# Altium PCB STM32_Main-PCB_2025-01-24.pcbdoc
Units mm, origin at the board's own origin, x right, y up, seen from the top; angles counter-clockwise.
Board outline 78.99 x 48.51 mm, 2 copper layers (Top Layer, Bottom Layer); 38 components, 54 nets, 179 pads, 32 vias.
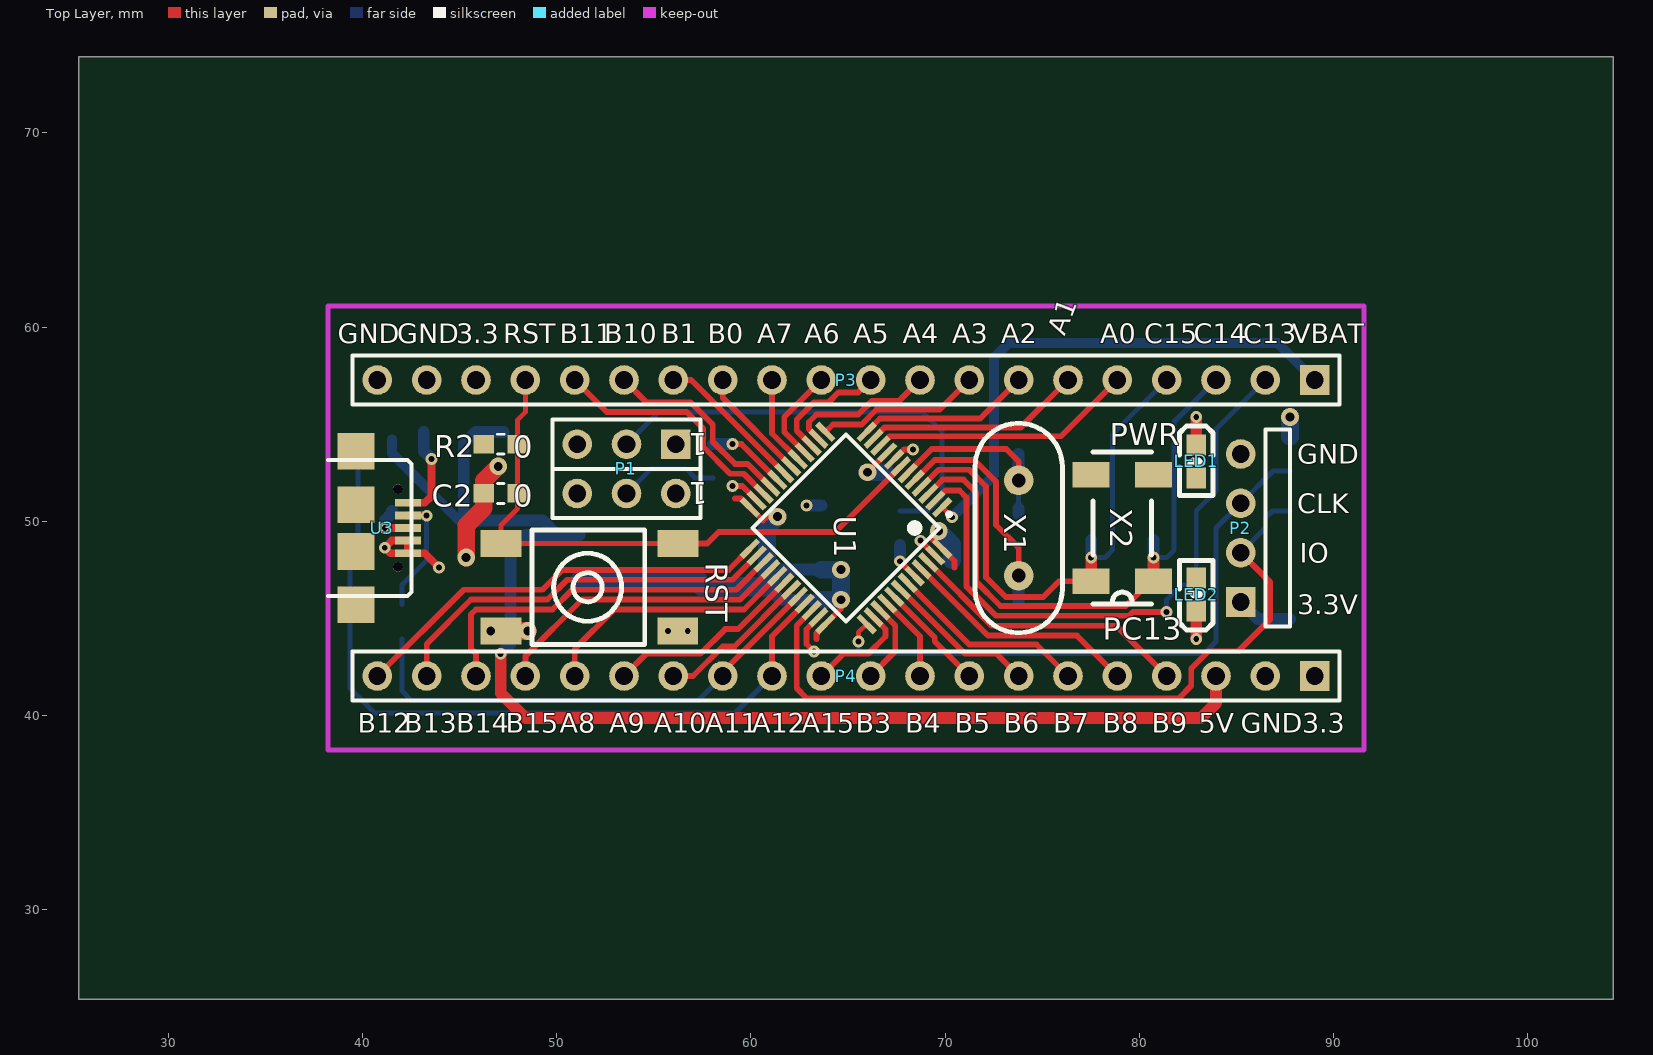
[diagram p0: Top Layer view]
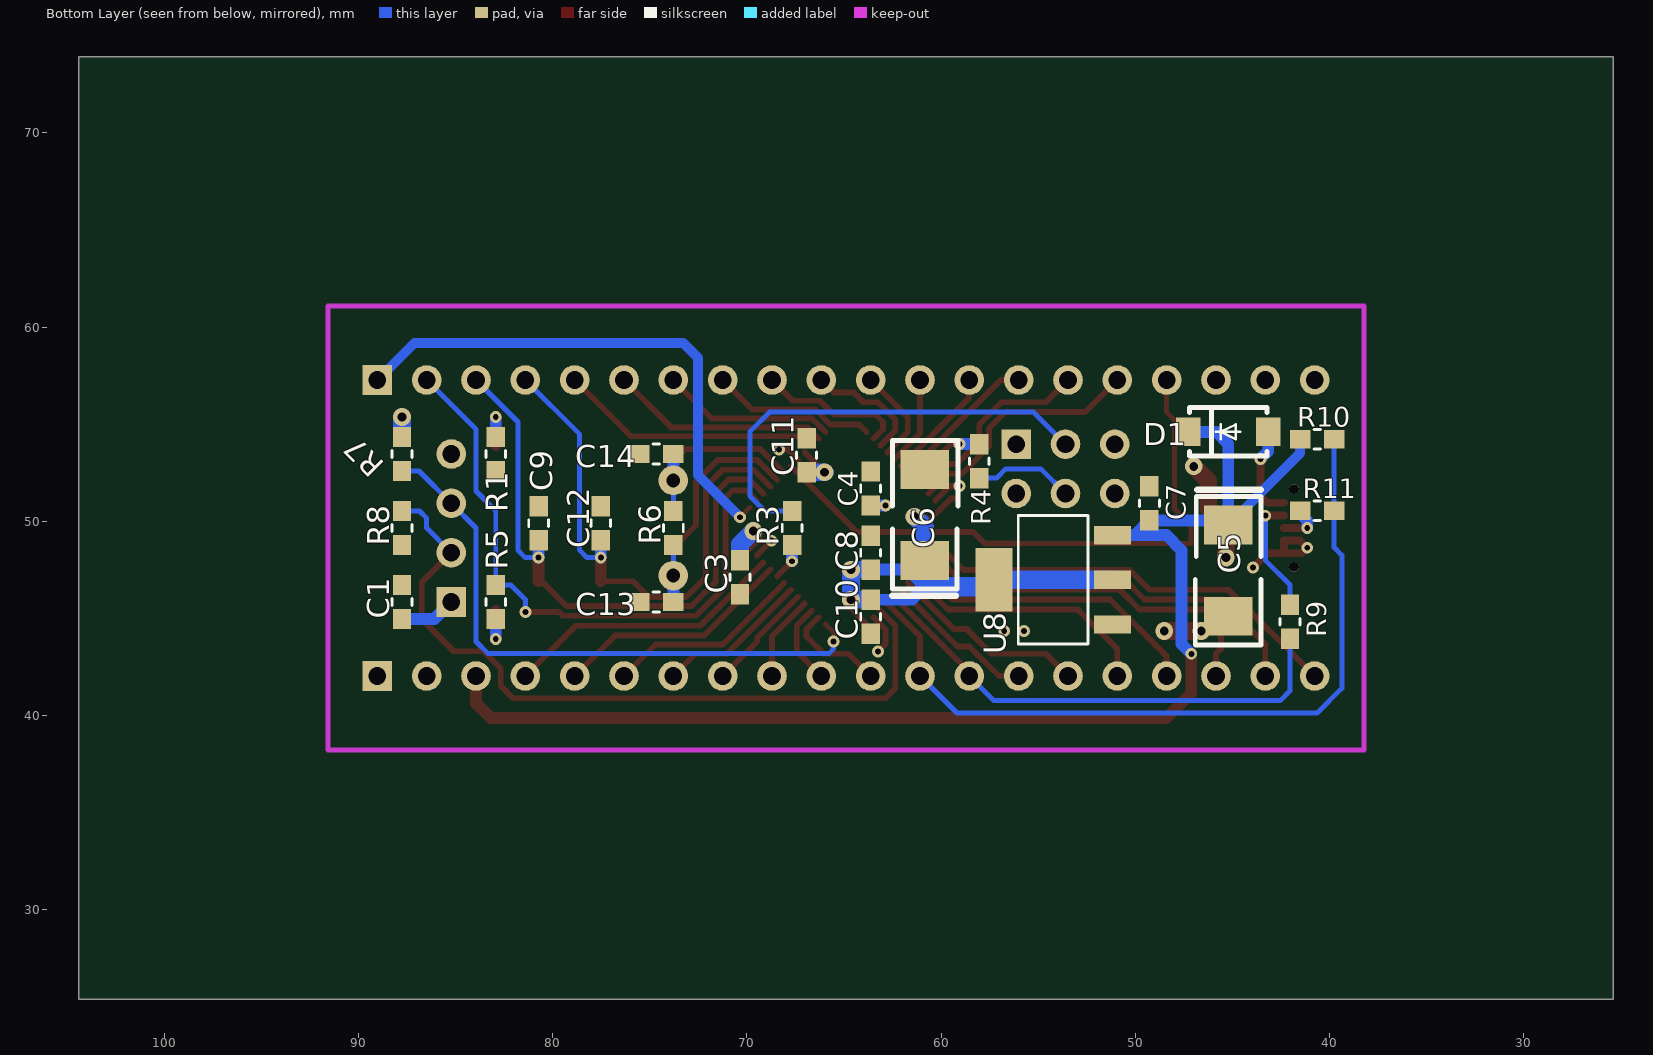
[diagram p1: Bottom Layer view, seen from below]

## Layer stack, top to bottom
Top Layer: signal copper (thickness not stored)
Dielectric: dielectric 0.32, FR-4, Dk 4.8
Bottom Layer: signal copper (thickness not stored)

## Board outline
104.394,25.4 25.4,25.4 25.4,73.914 104.394,73.914

## Components (designator, comment, footprint, x,y, rotation, side; value= is the part's Value field where it differs from the comment)
C1 "100nF" 0603_1608METRIC_PAD1.05X0.95MM_HANDSOLDER#1 87.757,45.847 r90 bottom
C2 "1uF" 0603_1608METRIC_PAD1.05X0.95MM_HANDSOLDER#2 47.117,51.435 r0 top
C3 "100nF" 0603_1608METRIC_PAD1.05X0.95MM_HANDSOLDER#1 70.355,47.117 r270 bottom
C4 "100nF" 0603_1608METRIC_PAD1.05X0.95MM_HANDSOLDER#1 63.627,51.689 r90 bottom
C5 "100uF" CASE-C_6032 45.212,47.46 r270 bottom
C6 "330uF" CASE-C_6032 60.833,50.328 r90 bottom
C7 "100nF" 0603_1608METRIC_PAD1.05X0.95MM_HANDSOLDER#1 49.276,50.927 r90 bottom
C8 "100nF" 0603_1608METRIC_PAD1.05X0.95MM_HANDSOLDER#1 63.627,48.387 r90 bottom
C9 "20pF" 0603_1608METRIC_PAD1.05X0.95MM_HANDSOLDER#1 80.721,49.911 r90 bottom
C10 "100nF" 0603_1608METRIC_PAD1.05X0.95MM_HANDSOLDER#1 63.627,45.085 r270 bottom
C11 "100nF" 0603_1608METRIC_PAD1.05X0.95MM_HANDSOLDER#1 66.929,53.405 r90 bottom
C12 "20pF" 0603_1608METRIC_PAD1.05X0.95MM_HANDSOLDER#1 77.521,49.911 r90 bottom
C13 "20pF" 0603_1608METRIC_PAD1.05X0.95MM_HANDSOLDER#1 74.662,45.847 r0 bottom
C14 "20pF" 0603_1608METRIC_PAD1.05X0.95MM_HANDSOLDER#1 74.662,53.467 r0 bottom
D1 "SS110-A" SMA(DO-214AC) 45.212,54.607 r180 bottom
LED1 "XL-0603QYGC" LED-0603 82.931,53.086 r270 top
LED2 "XL-0603QYGC" LED-0603 82.931,46.228 r90 top
P1 "HDR-IDC-2.54-2X3P" 3X2-2.54-HEADER 53.594,52.705 r270 top
P2 "SWD" HEADER-2.54-P4 85.217,49.657 r90 top
P3 "210S-1*20P L=11.6MMGold-plated black" HEADER-2.54-P20 64.897,57.277 r180 top
P4 "210S-1*20P L=11.6MMGold-plated black" HEADER-2.54-P20 64.897,42.037 r180 top
R1 "510" 0603_1608METRIC_PAD1.05X0.95MM_HANDSOLDER#1 82.931,53.467 r90 bottom
R2 "10K" 0603_1608METRIC_PAD1.05X0.95MM_HANDSOLDER#2 47.117,53.975 r180 top
R3 "100K" 0603_1608METRIC_PAD1.05X0.95MM_HANDSOLDER#1 67.67,49.657 r270 bottom
R4 "100K" 0603_1608METRIC_PAD1.05X0.95MM_HANDSOLDER#1 58.039,53.1 r90 bottom
R5 "510" 0603_1608METRIC_PAD1.05X0.95MM_HANDSOLDER#1 82.931,45.847 r270 bottom
R6 "1M" 0603_1608METRIC_PAD1.05X0.95MM_HANDSOLDER#1 73.787,49.657 r90 bottom
R7 "10K" 0603_1608METRIC_PAD1.05X0.95MM_HANDSOLDER#1 87.757,53.467 r90 bottom
R8 "10K" 0603_1608METRIC_PAD1.05X0.95MM_HANDSOLDER#1 87.757,49.657 r270 bottom
R9 "20" 0603_1608METRIC_PAD1.05X0.95MM_HANDSOLDER#1 42.037,44.831 r90 bottom
R10 "1.5K" 0603_1608METRIC_PAD1.05X0.95MM_HANDSOLDER#1 40.64,54.229 r180 bottom
R11 "20" 0603_1608METRIC_PAD1.05X0.95MM_HANDSOLDER#1 40.64,50.546 r0 bottom
RST "K2-6639SP-C4SC-04" KEY-6.0*6.0 51.689,46.609 r0 top
U1 "STM32F103C8T6" ST-LQFP48 64.897,49.657 r135 top
U3 "Micro USB-B 5P_C40942" USB-MICROB 38.227,49.657 r270 top
U8 "AMS1117-3.3" SOT-223 54.229,46.99 r270 bottom
X1 "8MHz" OSC-49S-1 73.787,49.657 r180 top
X2 "32.768KHz" MC-306 79.121,49.657 r90 top

## Footprints (in the part's own frame and the unit in brackets; to place one, negate y for a bottom-side part, rotate by r counter-clockwise, add the part's x,y. Pads: shape width x height; smd on the part's side, far side on the other; paste and mask are expansions set on the pad)
3X2-2.54-HEADER [mil]
  rect 60x60 hole 36 paste+0 mask+4: 1(-50,100)
  round 60 hole 36 paste+0 mask+4: 2(50,100) 3(-50,0) 4(50,0) 5(-50,-100) 6(50,-100)
  silkscreen extent -100,-150 100,150
0603_1608METRIC_PAD1.05X0.95MM_HANDSOLDER#1 [mm]
  rect 1.05x0.95 smd paste+0 mask+0.102: 1(0.875,0) 2(-0.875,0)
  silkscreen extent -0.17,-0.51 0.17,0.51
0603_1608METRIC_PAD1.05X0.95MM_HANDSOLDER#2 [mm]
  rect 1.05x0.95 smd paste+0 mask+0.102: 1(-0.875,0) 2(0.875,0)
  silkscreen extent -0.17,-0.51 0.17,0.51
CASE-C_6032 [mm]
  rect 2x2.5 smd paste+0 mask+0.102: 1(-2.35,0) 2(2.35,0)
  silkscreen extent -4.17,-1.7 3.84,1.68
HEADER-2.54-P4 [mil]
  rect 60x60 hole 36 paste+0 mask+4: 1(-150,0)
  round 60 hole 36 paste+0 mask+4: 2(-50,0) 3(50,0) 4(150,0)
  silkscreen extent -200,-100 200,-50
HEADER-2.54-P20 [mil]
  rect 60x60 hole 36 paste+0 mask+4: 1(-950,0)
  round 60 hole 36 paste+0 mask+4: 2(-850,0) 3(-750,0) 4(-650,0) 5(-550,0) 6(-450,0) 7(-350,0) 8(-250,0) 9(-150,0) 10(-50,0) 11(50,0) 12(150,0) 13(250,0) 14(350,0) 15(450,0) 16(550,0) 17(650,0) 18(750,0) 19(850,0) 20(950,0)
  silkscreen extent -1000,-50 1000,50
KEY-6.0*6.0 [mm]
  rect 2.1x1.4 smd paste+0 mask+0.102: 1(4.55,-2.252) 2(-4.553,-2.252) 3(4.553,2.252) 4(-4.553,2.249)
  silkscreen extent -2.95,-2.95 2.85,2.95
LED-0603 [mil]
  rect 43x39 smd paste+0 mask+4: 1(33.5,0) 2(-33.5,0)
  silkscreen extent -72,-34 70,34
MC-306 [mil]
  rect 51.2x74.8 smd paste+0 mask+4: 1(-108,-63) 2(108,-63) 3(108,63) 4(-108,63)
  silkscreen extent -154,-59 154,59
OSC-49S-1 [mil]
  round 60 hole 28 paste+0 mask+4: 1(0,96.46) 2(0,-96.46)
  silkscreen extent -89,-212 89,212
SMA(DO-214AC) [mil]
  rect 50x57.9 smd paste+0 mask+4: 1(81,0) 2(-81,0)
  silkscreen extent -79,-49 78,49
SOT-223 [mm]
  rect 0.95x1.9 smd paste+0 mask+0.102: 1(2.301,3.051) 2(0,3.051) 3(-2.3,3.051)
  rect 3.25x1.9 smd paste+0 mask+0.102: 4(0,-3.051)
  silkscreen extent -3.3,-1.8 3.3,1.8
ST-LQFP48 [mm]
  rect 0.3x1.2 smd paste+0 mask+0.05: 1(-2.751,-4.25) 2(-2.25,-4.25) 3(-1.75,-4.25) 4(-1.25,-4.249) 5(-0.75,-4.25) 6(-0.251,-4.25) 7(0.251,-4.25) 8(0.75,-4.25) 9(1.25,-4.249) 10(1.75,-4.25) 11(2.25,-4.25) 12(2.751,-4.25) 25(2.751,4.25) 26(2.25,4.25) 27(1.75,4.25) 28(1.25,4.249) 29(0.75,4.25) 30(0.251,4.25) 31(-0.251,4.25) 32(-0.75,4.25) 33(-1.25,4.249) 34(-1.75,4.25) 35(-2.25,4.25) 36(-2.75,4.249)
  rect 1.2x0.3 smd paste+0 mask+0.05: 13(4.25,-2.751) 14(4.25,-2.25) 15(4.25,-1.75) 16(4.249,-1.25) 17(4.25,-0.75) 18(4.25,-0.251) 19(4.25,0.251) 20(4.25,0.75) 21(4.249,1.25) 22(4.25,1.75) 23(4.25,2.25) 24(4.249,2.75) 37(-4.25,2.751) 38(-4.25,2.25) 39(-4.25,1.75) 40(-4.249,1.25) 41(-4.25,0.75) 42(-4.25,0.251) 43(-4.25,-0.251) 44(-4.25,-0.75) 45(-4.249,-1.25) 46(-4.25,-1.75) 47(-4.25,-2.25) 48(-4.249,-2.75)
  silkscreen extent -3.4,-4.35 3.4,3.4
USB-MICROB [mm]
  rect 1.9x1.9 smd paste+0 mask+0.102: 0(-3.95,1.45) 0(-1.199,1.45) 0(1.2,1.45) 0(3.95,1.45)
  rect 0.4x1.35 smd paste+0 mask+0.051: 1(-1.3,4.125) 2(-0.65,4.125) 3(0,4.125) 4(0.65,4.125) 5(1.3,4.125)
  round 0.5 hole 0.5 unplated paste+0: ""(-2,3.6) ""(2,3.6)
  silkscreen extent -3.5,0 3.5,4.3

## Via types
v1: diameter 0.61, hole 0.305, Top Layer to Bottom Layer, tented both sides, 22 vias
v2: diameter 0.914, hole 0.457, Top Layer to Bottom Layer, tented both sides, 10 vias

## Nets (pads, with @x,y where several pads share a name; then routed paths per layer and width w, separated by ;. In a path a pad name is that pad's centre, name@x,y a point inside that pad or via, vN(x,y) a via of type N, cw(c..) or ccw(c..) an arc to the next point about the centre after c; other vN are vias at no path point)
+5V: C5.1 C7.2 D1.2 P4.3 R10.2 U8.3 | length 69
  Top Layer w0.61: v1(47.117,43.18) 47.117,41.148 48.387,39.878 83.185,39.878 83.947,40.64 P4.3
  Bottom Layer w0.508: R10.2 41.515,53.507 C5.1
  Bottom Layer w0.61: v1(47.117,43.18) 47.625,43.688 47.625,48.514 48.387,49.276 48.401,49.29 U8.3@50.85,49.29 ; D1.2 45.844,54.607 45.212,53.975 C5.1 45.454,50.052 C7.2 50.038,49.29 U8.3
BOOT0: R3.1 U1.44 | length 1.9
  Top Layer w0.3: v1(67.67,47.944) U1.44
  Bottom Layer w0.61: v1(67.67,47.944) R3.1
BOOT1: R4.1 U1.20 | length 4.1
  Top Layer w0.3: v1(59.055,53.975) 59.519,53.975 U1.20
  Bottom Layer w0.61: R4.1 v1(59.055,53.975)
GND: C1.1 C2.1 C3.1 C4.1 C5.2 C6.2 C7.1 C8.1 C9.1 C10.1 C11.1 C12.1 C13.1 C14.1 P1.5 P1.6 P2.4 P3.19 P3.20 P4.2 R1.2 R8.1 RST.1 RST.2 U1.8 U1.23 U1.35 U1.47 U3.4 U3.5 U8.1 | length 18.5
  Top Layer w0.3: v1(59.055,51.816) 59.556,51.816 U1.23 ; v1(63.246,43.307) 62.865,43.688 62.865,44.444 U1.35 ; U1.8 67.883,53.704 v1(68.35,53.704) ; v1(68.731,49.005) U1.47
  Top Layer w0.4: v1(43.942,47.625) 43.561,48.006 43.211,48.356 U3.5 ; U3.5 U3.4 41.514,49.007 v1(41.148,48.641) 41.432,48.357 U3.5
  Top Layer w0.914: v2(45.339,48.133) 45.339,49.784 46.241,50.686 C2.1@46.241,51.435 ; C2.1 46.242,52.084 v2(46.99,52.832) ; v2(46.609,44.357) v2(48.514,44.357)
  other v1: 55.731,44.357 56.747,44.357
LED1_2: LED1.2 R1.1 | length 2.5
  Top Layer w0.61: LED1.2 v1(82.931,55.372)
  Bottom Layer w0.61: R1.1 v1(82.931,55.372)
LED2_2: LED2.2 R5.1 | length 2.5
  Top Layer w0.61: v1(82.931,43.942) LED2.2
  Bottom Layer w0.61: v1(82.931,43.942) R5.1
OSCIN: C13.2 R6.2 U1.5 X1.1 | length 13.3
  Top Layer w0.3: U1.5 69.464,53.162 71.501,53.162 72.619,52.045 72.619,49.809 73.787,48.641 X1.1
  Bottom Layer w0.254: X1.1 R6.2
  Bottom Layer w0.61: C13.2 X1.1
OSCOUT: C14.2 R6.1 U1.6 X1.2 | length 10.7
  Top Layer w0.3: U1.6 69.314,53.721 73.152,53.721 73.787,53.086 X1.2
  Bottom Layer w0.254: R6.1 X1.2
  Bottom Layer w0.61: R6.1@73.787,50.357 R6.1@73.787,50.659 ; X1.2 C14.2
PA0: P3.5 U1.10 | length 13.6
  Top Layer w0.3: U1.10 67.147,54.381 75.971,54.381 P3.5
PA1: P3.6 U1.11 | length 11.3
  Top Layer w0.3: U1.11@66.312,54.252 66.896,54.839 73.889,54.839 P3.6
PA2: P3.7 U1.12 | length 8.9
  Top Layer w0.3: U1.12 66.647,55.296 71.806,55.296 P3.7
PA3: P3.8 U1.13 | length 8.5
  Top Layer w0.3: U1.13 64.221,54.991 65.71,54.991 66.472,55.753 69.723,55.753 P3.8
PA4: P3.9 U1.14 | length 7.7
  Top Layer w0.3: U1.14@63.482,54.252 62.992,54.745 62.992,55.118 63.373,55.499 65.532,55.499 66.243,56.21 67.64,56.21 P3.9
PA5: P3.10 U1.15 | length 6.3
  Top Layer w0.3: U1.15 62.357,54.671 62.357,55.245 63.246,56.134 64.008,56.134 64.516,56.642 65.532,56.642 P3.10
PA6: P3.11 U1.16 | length 5
  Top Layer w0.3: U1.16 61.722,54.6 61.722,55.372 P3.11
PA7: P3.12 U1.17 | length 4.6
  Top Layer w0.3: P3.12 61.087,54.528 U1.17
PA8: P4.16 U1.29 | length 13.4
  Top Layer w0.3: P4.16 50.927,43.434 52.959,45.466 59.644,45.466 U1.29
PA9: P4.15 U1.30 | length 10.2
  Top Layer w0.3: P4.15 54.61,43.18 57.404,43.18 58.674,44.45 59.337,44.45 U1.30
PA10: P4.14 U1.31 | length 7.9
  Top Layer w0.3: P4.14 57.023,42.037 58.547,43.561 59.154,43.561 U1.31
PA11: P4.13 R9.2 U1.32 | length 25.6
  Top Layer w0.3: P4.13 58.547,42.247 U1.32
  Bottom Layer w0.254: R9.2@42.037,43.955 42.037,41.275 42.545,40.767 57.277,40.767 P4.13
PA12: P4.12 R10.1 R11.2 U1.33 | length 40.5
  Top Layer w0.3: P4.12 61.087,44.079 U1.33
  Bottom Layer w0.254: R11.2@39.764,50.546 39.764,48.654 39.37,48.26 39.37,41.402 40.64,40.132 59.182,40.132 P4.12 ; R11.2 R10.1
PA15: P4.11 U1.38 | length 5.4
  Top Layer w0.3: P4.11 64.77,43.18 66.04,43.18 66.929,44.069 66.929,44.442 U1.38@66.312,45.062
PB0: P3.13 U1.18 | length 5.9
  Top Layer w0.3: P3.13 58.547,56.36 U1.18
PB1: P3.14 U1.19 | length 7.7
  Top Layer w0.3: P3.14 56.924,57.277 U1.19
PB3: P4.10 U1.39 | length 4.2
  Top Layer w0.3: P4.10 67.437,43.307 67.437,44.642 U1.39
PB4: P4.9 U1.40 | length 4.4
  Top Layer w0.3: U1.40 68.707,44.079 P4.9
PB5: P4.8 U1.41 | length 5.7
  Top Layer w0.3: U1.41 69.469,44.024 69.469,43.815 P4.8
PB6: P4.7 U1.42 | length 7.9
  Top Layer w0.3: U1.42 71.021,43.18 72.644,43.18 P4.7
PB7: P4.6 U1.43 | length 10.2
  Top Layer w0.3: U1.43 71.244,43.663 74.701,43.663 P4.6
PB8: P4.5 U1.45 | length 12.4
  Top Layer w0.3: U1.45 72.202,44.12 76.784,44.12 P4.5
PB9: P4.4 U1.46 | length 14.7
  Top Layer w0.3: U1.46 72.4,44.628 78.816,44.628 P4.4
PB10: P3.15 U1.21 | length 10.3
  Top Layer w0.3: P3.15 54.61,56.134 56.896,56.134 58.039,54.991 58.039,54.102 59.182,52.959 59.827,52.959 U1.21
PB11: P3.16 U1.22 | length 12.7
  Top Layer w0.3: P3.16 52.578,55.626 56.693,55.626 57.531,54.788 57.531,53.848 58.928,52.451 59.629,52.451 U1.22
PB12: P4.20 U1.25 | length 21.9
  Top Layer w0.3: P4.20 45.212,46.482 49.276,46.482 50.292,47.498 58.849,47.498 U1.25
PB13: P4.19 U1.26 | length 20.5
  Top Layer w0.3: P4.19 43.307,43.688 45.593,45.974 49.53,45.974 50.546,46.99 59.047,46.99 U1.26@60.302,48.242
PB14: P4.18 U1.27 | length 19.5
  Top Layer w0.3: P4.18 45.847,43.18 45.593,43.434 45.593,45.212 45.847,45.466 49.784,45.466 50.8,46.482 59.248,46.482 U1.27
PB15: P4.17 U1.28 | length 15.5
  Top Layer w0.3: P4.17 48.387,43.053 51.308,45.974 59.446,45.974 U1.28
PC13: P3.2 R5.2 U1.2 | length 32.1
  Top Layer w0.3: U1.2 70.01,51.587 70.739,51.587 71.095,51.232 71.095,46.66 72.619,45.136 79.477,45.136 79.68,45.339 v1(81.407,45.339)
  Bottom Layer w0.254: v1(81.407,45.339) 81.407,45.974 82.154,46.723 82.931,46.723 82.931,50.546 83.947,51.562 83.947,54.737 P3.2
PC14: C9.2 P3.3 U1.3 X2.1 | length 30.8
  Top Layer w0.3: U1.3 69.86,52.146 70.942,52.146 71.603,51.486 71.603,46.888 72.847,45.644 79.299,45.644 80.569,46.914 X2.1
  Top Layer w0.61: X2.1 v1(80.721,48.133)
  Bottom Layer w0.254: v1(80.721,48.133) 81.407,48.133 81.788,48.514 81.788,49.276 81.788,55.118 P3.3
  Bottom Layer w0.61: v1(80.721,48.133) C9.2
PC15: C12.2 P3.4 U1.4 X2.4 | length 28.2
  Top Layer w0.3: U1.4 69.662,52.654 71.247,52.654 72.111,51.791 72.111,47.117 73.127,46.101 75.057,46.101 75.87,46.914 X2.4
  Top Layer w0.61: X2.4 v1(77.521,48.133)
  Bottom Layer w0.254: v1(77.521,48.133) 78.232,48.133 78.613,48.514 78.613,54.483 P3.4
  Bottom Layer w0.61: v1(77.521,48.133) C12.2
R3_2: P1.3 R3.2 | length 23.2
  Bottom Layer w0.254: P1.3 55.245,55.626 68.834,55.626 69.85,54.61 69.85,51.308 69.073,50.533 R3.2@67.671,50.533
R4_2: P1.4 R4.2 | length 5.2
  Bottom Layer w0.254: P1.4 54.864,52.705 56.667,52.705 57.147,52.225 R4.2
RESET: C2.2 P3.17 R2.1 RST.3 RST.4 U1.7 | length 31.2
  Top Layer w0.254: RST.4@47.135,48.857 47.135,49.802 47.993,50.66 C2.2@47.993,51.435 ; RST.4 RST.4 RST.3 ; C2.2 R2.1 ; R2.1@47.993,53.975 47.993,55.232 48.387,55.626 P3.17
  Top Layer w0.3: RST.3@56.243,48.859 57.749,48.859 58.344,49.454 64.341,49.454 U1.7
S$65: 
S$556: 
SWCLK: P2.3 R7.2 U1.37 | length 31.1
  Top Layer w0.254: v1(65.532,43.815) 65.532,44.281 U1.37@65.957,44.707
  Bottom Layer w0.254: v1(65.532,43.815) 65.532,43.434 65.761,43.205 83.337,43.205 83.947,43.815 83.947,49.657 P2.3 86.883,52.591 R7.2@87.757,52.591
SWDIO: P2.2 R8.2 U1.34 | length 38.9
  Top Layer w0.3: U1.34@63.129,45.413 62.357,44.64 62.357,41.402 62.865,40.894 82.042,40.894 82.677,41.529 82.677,42.418 83.566,43.307 85.09,43.307 86.741,44.958 86.741,46.863 P2.2
  Bottom Layer w0.254: P2.2 86.487,49.657 86.487,50.165 86.853,50.533 R8.2@87.757,50.533
U3_1: D1.1 U3.1 | length 4.8
  Top Layer w0.4: U3.1 43.21,50.957 43.561,51.308 v1(43.561,53.213)
  Bottom Layer w0.61: D1.1@43.155,54.61 43.155,53.619 v1(43.561,53.213)
U3_2: R9.1 U3.2 | length 6.1
  Top Layer w0.4: U3.2 43.292,50.307 v1(43.307,50.292)
  Bottom Layer w0.254: R9.1@42.037,45.707 42.037,46.736 43.307,48.006 v1(43.307,50.292)
U3_3: R11.1 U3.3 | length 2.2
  Top Layer w0.4: v1(41.148,49.657) U3.3
  Bottom Layer w0.61: v1(41.148,49.657) 41.148,50.038 41.515,50.405 R11.1
VBAT: P3.1 U1.1 | length 27.4
  Top Layer w0.254: U1.1 v1(70.355,50.21)
  Bottom Layer w0.508: v1(70.355,50.21) 72.517,52.372 72.517,58.42 73.279,59.182 87.122,59.182 P3.1
VCC: C1.2 C3.2 C4.2 C6.1 C8.2 C10.2 C11.2 LED1.1 LED2.1 P1.1 P1.2 P2.1 P3.18 P4.1 R2.2 R7.1 U1.9 U1.24 U1.36 U1.48 U8.2 U8.4 | length 39.1
  Top Layer w0.3: 59.182,51.181 59.484,51.181 U1.24 ; U1.24@59.947,50.719 60.627,50.038 60.83,50.241 v2(61.366,50.241) ; 63.373,43.942 63.373,44.244 U1.36@63.533,44.404 ; U1.36 64.643,45.514 v2(64.643,45.96) ; v2(66.002,52.53) U1.9 ; v2@69.342,49.403 69.342,49.101 U1.48 ; U1.48@70.134,48.309 70.485,47.958 70.485,47.625
  Bottom Layer w0.61: v1(62.865,50.814) C4.2 ; C10.2 61.506,45.96 60.833,46.633 61.712,47.512 C8.2 ; P2.1 86.092,44.972 C1.2
  Bottom Layer w0.914: 60.833,46.633 60.833,49.708 v2(61.366,50.241) ; C10.2 v2(64.643,45.96) v2(64.643,47.512) C8.2 ; v2(66.002,52.53) C11.2 ; v2(69.672,49.499) 70.355,48.816 C3.2 ; R7.1@87.757,54.356 v2(87.757,55.372)
  Bottom Layer w0.95: U8.2 U8.4
  Bottom Layer w1.016: U8.4@57.15,46.99 57.507,46.633 60.833,46.633
X2_2: X2.2
X2_3: X2.3
pads on no net: U3. U3.0

## Polygon pours and split planes (outlines as drawn)
VCC on Top Layer (solid): 38.227,61.087 91.567,61.087 91.567,38.227 38.227,38.227
GND on Bottom Layer (solid): 38.227,61.087 91.567,61.087 91.567,38.227 38.227,38.227

## Silkscreen, mask and mechanical layers (free items; w line width, h text height)
Top Overlay:
  text "A1" at 76.166,59.508 h1.02 r69
  text "GND" at 38.735,59.182 h1.02
  text "GND" at 41.783,59.182 h1.02
  text "3.3" at 44.831,59.182 h1.02
  text "RST" at 47.244,59.182 h1.02
  text "B11" at 50.165,59.182 h1.02
  text "B10" at 52.451,59.182 h1.02
  text "B1" at 55.372,59.182 h1.02
  text "B0" at 57.785,59.182 h1.02
  text "A7" at 60.325,59.182 h1.02
  text "A6" at 62.738,59.182 h1.02
  text "A5" at 65.278,59.182 h1.02
  text "A4" at 67.818,59.182 h1.02
  text "A3" at 70.358,59.182 h1.02
  text "A2" at 72.898,59.182 h1.02
  text "A0" at 77.978,59.182 h1.02
  text "C15" at 80.264,59.182 h1.02
  text "C14" at 82.804,59.182 h1.02
  text "C13" at 85.344,59.182 h1.02
  text "VBAT" at 87.884,59.182 h1.02
  text "1" at 57.785,54.546 h1.14 r180
  text "0" at 48.768,54.419 h1.14 r180
  text "PWR" at 78.486,53.924 h1.14
  text "GND" at 88.138,52.959 h1.02
  text "1" at 57.785,52.006 h1.14 r180
  text "0" at 48.768,51.88 h1.14 r180
  text "CLK" at 88.138,50.419 h1.02
  text "IO" at 88.265,47.879 h1.02
  text "3.3V" at 88.138,45.212 h1.02
  text "PC13" at 78.105,43.891 h1.14
  text "B12" at 39.751,39.116 h1.02
  text "B13" at 42.164,39.116 h1.02
  text "B14" at 44.831,39.116 h1.02
  text "B15" at 47.371,39.116 h1.02
  text "A8" at 50.165,39.116 h1.02
  text "A9" at 52.705,39.116 h1.02
  text "A10" at 54.991,39.116 h1.02
  text "A11" at 57.658,39.116 h1.02
  text "A12" at 60.071,39.116 h1.02
  text "A15" at 62.611,39.116 h1.02
  text "B3" at 65.405,39.116 h1.02
  text "B4" at 67.945,39.116 h1.02
  text "B5" at 70.485,39.116 h1.02
  text "B6" at 73.025,39.116 h1.02
  text "B7" at 75.565,39.116 h1.02
  text "B8" at 78.105,39.116 h1.02
  text "B9" at 80.645,39.116 h1.02
  text "5V" at 83.058,39.116 h1.02
  text "GND" at 85.217,39.116 h1.02
  text "3.3" at 88.392,39.116 h1.02